# EAGLE board CT_schematic (EAGLE 7.6.0)

Size 100 x 80 mm. Coordinates in mm from the lower left corner, seen from the top.
Outline: 0,0 100,0 100,80 0,80 0,0
Copper layers (1*16): Top 0.035mm / dielectric 1.5mm / Bottom 0.035mm
Design rules "default": minimum track width 10mil, minimum drill 24mil, track to track 8mil, track to pad 8mil, pad to pad 8mil, via to via 8mil, smd to smd 8mil, copper to edge 40mil, drill to drill 8mil, minimum pad ring 10mil, minimum via ring 8mil, stop-mask expansion 4mil, vias tented up to drill 0mil, thermal gap 10mil

## Footprints (pad centres in the part's own frame; a part is rotated, then mirrored left to right if it is on the bottom)
C0603 = smd 0.8 x 0.8: 1 -0.762,0; 2 0.762,0
C0402 = smd 0.5 x 0.5: 1 -0.508,0; 2 0.508,0
C0805 = smd 1.2 x 1.3: 1 -1.016,0; 2 1.016,0
C1210 = smd 1.2 x 2.5: 1 -1.524,0; 2 1.524,0
R0603 = smd 0.8 x 0.8: 1 -0.762,0; 2 0.762,0
EXV-9H = smd 3.505 x 1.676: 1 -2.857,0; 2 2.857,0
L1210 = smd 1.2 x 2.5: 1 -1.524,0; 2 1.524,0
PJ-037B_PACKAGE = drill 3.7 square: 1 12,0 | drill 3.2 square: 2 6,0
UFBGA132 = smd 0.32 x 0.32: A1 -2.75,2.75; A2 -2.25,2.75; A3 -1.75,2.75; A4 -1.25,2.75; A5 -0.75,2.75; A6 -0.25,2.75; A7 0.25,2.75; A8 0.75,2.75; A9 1.25,2.75; A10 1.75,2.75; A11 2.25,2.75; A12 2.75,2.75; B1 -2.75,2.25; B2 -2.25,2.25; B3 -1.75,2.25; B4 -1.25,2.25; B5 -0.75,2.25; B6 -0.25,2.25; B7 0.25,2.25; B8 0.75,2.25; B9 1.25,2.25; B10 1.75,2.25; B11 2.25,2.25; B12 2.75,2.25; C1 -2.75,1.75; C2 -2.25,1.75; C3 -1.75,1.75; C4 -1.25,1.75; C5 -0.75,1.75; C6 -0.25,1.75; C7 0.25,1.75; C8 0.75,1.75; C9 1.25,1.75; C10 1.75,1.75; C11 2.25,1.75; C12 2.75,1.75; D1 -2.75,1.25; D2 -2.25,1.25; D3 -1.75,1.25; D4 -1.25,1.25; D5 -0.75,1.25; D6 -0.25,1.25; D7 0.25,1.25; D8 0.75,1.25; D9 1.25,1.25; D10 1.75,1.25; D11 2.25,1.25; D12 2.75,1.25; E1 -2.75,0.75; E2 -2.25,0.75; E3 -1.75,0.75; E4 -1.25,0.75; E9 1.25,0.75; E10 1.75,0.75; E11 2.25,0.75; E12 2.75,0.75; F1 -2.75,0.25; F2 -2.25,0.25; F3 -1.75,0.25; F4 -1.25,0.25; F6 -0.25,0.25; F7 0.25,0.25; F9 1.25,0.25; F10 1.75,0.25; F11 2.25,0.25; F12 2.75,0.25; G1 -2.75,-0.25; G2 -2.25,-0.25; G3 -1.75,-0.25; G4 -1.25,-0.25; G6 -0.25,-0.25; G7 0.25,-0.25; G9 1.25,-0.25; G10 1.75,-0.25; G11 2.25,-0.25; G12 2.75,-0.25; H1 -2.75,-0.75; H2 -2.25,-0.75; H3 -1.75,-0.75; H4 -1.25,-0.75; H9 1.25,-0.75; H10 1.75,-0.75; H11 2.25,-0.75; H12 2.75,-0.75; J1 -2.75,-1.25; J2 -2.25,-1.25; J3 -1.75,-1.25; J4 -1.25,-1.25; J5 -0.75,-1.25; J6 -0.25,-1.25; J7 0.25,-1.25; J8 0.75,-1.25; J9 1.25,-1.25; J10 1.75,-1.25; J11 2.25,-1.25; J12 2.75,-1.25; K1 -2.75,-1.75; K2 -2.25,-1.75; K3 -1.75,-1.75; K4 -1.25,-1.75; K5 -0.75,-1.75; K6 -0.25,-1.75; K7 0.25,-1.75; K8 0.75,-1.75; K9 1.25,-1.75; K10 1.75,-1.75; K11 2.25,-1.75; K12 2.75,-1.75; L1 -2.75,-2.25; L2 -2.25,-2.25; L3 -1.75,-2.25; L4 -1.25,-2.25; L5 -0.75,-2.25; L6 -0.25,-2.25; L7 0.25,-2.25; L8 0.75,-2.25; L9 1.25,-2.25; L10 1.75,-2.25; L11 2.25,-2.25; L12 2.75,-2.25; M1 -2.75,-2.75; M2 -2.25,-2.75; M3 -1.75,-2.75; M4 -1.25,-2.75; M5 -0.75,-2.75; M6 -0.25,-2.75; M7 0.25,-2.75; M8 0.75,-2.75; M9 1.25,-2.75; M10 1.75,-2.75; M11 2.25,-2.75; M12 2.75,-2.75
WSON-6 = smd 0.4 x 0.6: 1 -1,-1.4; 2 0,-1.4; 3 1,-1.4; 4 1,1.4; 5 0,1.4; 6 -1,1.4 | drill 0.2 pad 0.3: P$1 0.95,0; P$2 -0.95,0; P$3 0,-0.5; P$4 0,0.5 | smd 2.4 x 1.5: PAD 0,0
TST-110-05-T-D-RA = drill 1 pad 1.7 square: 1 0,0 | drill 1 pad 1.7: 2 0,2.54; 3 2.54,0; 4 2.54,2.54; 5 5.08,0; 6 5.08,2.54; 7 7.62,0; 8 7.62,2.54; 9 10.16,0; 10 10.16,2.54; 11 12.7,0; 12 12.7,2.54; 13 15.24,0; 14 15.24,2.54; 15 17.78,0; 16 17.78,2.54; 17 20.32,0; 18 20.32,2.54; 19 22.86,0; 20 22.86,2.54
SSOP-16 = smd 1.981 x 0.356: 1 -2.464,2.223; 2 -2.464,1.587; 3 -2.464,0.953; 4 -2.464,0.318; 5 -2.464,-0.318; 6 -2.464,-0.953; 7 -2.464,-1.587; 8 -2.464,-2.223; 9 2.464,-2.223; 10 2.464,-1.587; 11 2.464,-0.953; 12 2.464,-0.318; 13 2.464,0.318; 14 2.464,0.953; 15 2.464,1.587; 16 2.464,2.223
182-009-MALE = drill 1.194 pad 1.524 octagon: 1 -5.537,10.923; 2 -2.769,10.923; 3 0,10.923; 4 2.769,10.923; 5 5.537,10.923; 6 -4.153,8.08; 7 -1.384,8.08; 8 1.384,8.08; 9 4.153,8.08 | hole 3.048: -12.446,9.501; 12.446,9.501
SOIC-8 = smd 1.6 x 0.6: 1 -2.7,1.905 | smd 1.55 x 0.6: 2 -2.7,0.635; 3 -2.7,-0.635; 4 -2.7,-1.905; 5 2.7,-1.905; 6 2.7,-0.635; 7 2.7,0.635; 8 2.7,1.905
MOLEX_47219-2001 = smd 0.8 x 1.5: 1 3.2,-2.1; 2 2.1,-2.1; 3 1,-2.1; 4 -0.1,-2.1; 5 -1.2,-2.1; 6 -2.3,-2.1; 7 -3.4,-2.1; 8 -4.5,-2.1 | smd 1.5 x 2.05: G1 6.875,-4.7; G2 6.875,3.6; G3 -6.875,3.6; G4 -6.875,-4.7
LBGA-64 = smd 0.559 x 0.559: A1 -3.5,3.5; A2 -2.5,3.5; A3 -1.5,3.5; A4 -0.5,3.5; A5 0.5,3.5; A6 1.5,3.5; A7 2.5,3.5; A8 3.5,3.5; B1 -3.5,2.5; B2 -2.5,2.5; B3 -1.5,2.5; B4 -0.5,2.5; B5 0.5,2.5; B6 1.5,2.5; B7 2.5,2.5; B8 3.5,2.5; C1 -3.5,1.5; C2 -2.5,1.5; C3 -1.5,1.5; C4 -0.5,1.5; C5 0.5,1.5; C6 1.5,1.5; C7 2.5,1.5; C8 3.5,1.5; D1 -3.5,0.5; D2 -2.5,0.5; D3 -1.5,0.5; D4 -0.5,0.5; D5 0.5,0.5; D6 1.5,0.5; D7 2.5,0.5; D8 3.5,0.5; E1 -3.5,-0.5; E2 -2.5,-0.5; E3 -1.5,-0.5; E4 -0.5,-0.5; E5 0.5,-0.5; E6 1.5,-0.5; E7 2.5,-0.5; E8 3.5,-0.5; F1 -3.5,-1.5; F2 -2.5,-1.5; F3 -1.5,-1.5; F4 -0.5,-1.5; F5 0.5,-1.5; F6 1.5,-1.5; F7 2.5,-1.5; F8 3.5,-1.5; G1 -3.5,-2.5; G2 -2.5,-2.5; G3 -1.5,-2.5; G4 -0.5,-2.5; G5 0.5,-2.5; G6 1.5,-2.5; G7 2.5,-2.5; G8 3.5,-2.5; H1 -3.5,-3.5; H2 -2.5,-3.5; H3 -1.5,-3.5; H4 -0.5,-3.5; H5 0.5,-3.5; H6 1.5,-3.5; H7 2.5,-3.5; H8 3.5,-3.5
ABS07-32.768KHZ-7-T = smd 1.1 x 2.4: 1 -2.5,0; 2 0,0
ABLS-25.000MHZ-B2F-T = smd 5.6 x 2.8: 1 -3.81,0; 2 5.69,0
WSON-8 = smd 0.3 x 0.6: 1 -0.75,0; 2 0.05,0; 3 0.85,0; 4 1.65,0; 5 1.65,3.8; 6 0.85,3.8; 7 0.05,3.8; 8 -0.75,3.8 | smd 3 x 2.6: PAD 0.45,1.9
SON-6 = smd 0.55 x 0.3: 1 -0.355,0.5 | smd 0.52 x 0.3: 2 -0.37,0; 3 -0.37,-0.5; 4 0.37,-0.5; 5 0.37,0; 6 0.37,0.5
SW_4-1437565-2 = smd 1.4 x 2.1: 1 -2.23,4.55; 2 -2.23,-4.55; 3 2.23,4.55; 4 2.23,-4.55
LGM67K-G1J2-24-Z = smd 0.8 x 1.4: A -2,0; C 0,0
NC7SZ125M5X = smd 1.3 x 0.7: 1 -1.3,0.95; 2 -1.3,0; 3 -1.3,-0.95; 4 1.3,-0.95; 5 1.3,0.95

## Placement (x,y rotation side)
C1  1e-06  [C0603]  -41.91,81.28 0 top  (outside the outline)
C2  1e-07  [C0603]  -45.72,81.28 0 top  (outside the outline)
C3  1e-07  [C0603]  -49.53,81.28 0 top  (outside the outline)
C4  1e-07  [C0603]  -53.34,81.28 0 top  (outside the outline)
C5  1e-07  [C0603]  -57.15,81.28 0 top  (outside the outline)
C6  1e-07  [C0603]  -60.96,81.28 0 top  (outside the outline)
C7  1e-07  [C0603]  -64.77,81.28 0 top  (outside the outline)
C8  1e-07  [C0603]  -68.58,81.28 0 top  (outside the outline)
C9  1e-07  [C0603]  -72.39,81.28 0 top  (outside the outline)
C10  4.7e-06  [C0603]  -34.29,81.28 0 top  (outside the outline)
C11  1e-07  [C0603]  -76.2,81.28 0 top  (outside the outline)
C12  1e-07  [C0603]  -80.01,81.28 0 top  (outside the outline)
C13  1e-07  [C0603]  -83.82,81.28 0 top  (outside the outline)
C14  1e-08  [C0603]  -87.63,81.28 0 top  (outside the outline)
C15  1e-06  [C0603]  -15.24,86.36 0 top  (outside the outline)
C16  1e-11  [C0402]  -80.01,86.36 0 top  (outside the outline)
C17  1e-11  [C0402]  -83.82,86.36 0 top  (outside the outline)
C18  1e-11  [C0402]  -87.63,86.36 0 top  (outside the outline)
C19  1e-11  [C0402]  -15.24,91.44 0 top  (outside the outline)
C20  1e-08  [C0402]  -19.05,91.44 0 top  (outside the outline)
C21  1e-07  [C0402]  -22.86,91.44 0 top  (outside the outline)
C22  1e-07  [C0402]  -26.67,91.44 0 top  (outside the outline)
C23  1e-06  [C0603]  -19.05,86.36 0 top  (outside the outline)
C24  1e-06  [C0603]  -22.86,86.36 0 top  (outside the outline)
C25  2.2e-07  [C0603]  -38.1,81.28 0 top  (outside the outline)
C26  1e-06  [C0603]  -26.67,86.36 0 top  (outside the outline)
C27  1e-06  [C0603]  -30.48,86.36 0 top  (outside the outline)
C28  1e-06  [C0603]  -34.29,86.36 0 top  (outside the outline)
C29  1e-06  [C0603]  -38.1,86.36 0 top  (outside the outline)
C30  1e-07  [C0402]  -30.48,91.44 0 top  (outside the outline)
C31  1e-05  [C0805]  -46.99,69.85 0 top  (outside the outline)
C32  1e-08  [C0402]  -34.29,91.44 0 top  (outside the outline)
C33  1e-08  [C0402]  -38.1,91.44 0 top  (outside the outline)
C34  1e-08  [C0402]  -41.91,91.44 0 top  (outside the outline)
C35  1e-05  [C1210]  -80.01,63.5 0 top  (outside the outline)
C36  1e-05  [C1210]  -86.36,63.5 0 top  (outside the outline)
C37  8e-07  [R0603]  -41.91,86.36 0 top  (outside the outline)
C38  1e-05  [C1210]  -16.51,71.12 0 top  (outside the outline)
C39  1e-07  [C0402]  -45.72,91.44 0 top  (outside the outline)
C40  0.0001  [EXV-9H]  -80.01,54.61 0 top  (outside the outline)
C41  0.0001  [EXV-9H]  -17.78,63.5 0 top  (outside the outline)
C42  1e-08  [C0402]  -49.53,91.44 0 top  (outside the outline)
C43  1e-08  [C0402]  -53.34,91.44 0 top  (outside the outline)
C44  1e-08  [C0402]  -57.15,91.44 0 top  (outside the outline)
I1  1e-05  [L1210]  -22.86,71.12 0 top  (outside the outline)
J1  PJ-037B  [PJ-037B_PACKAGE]  -62.23,29.21 0 top  (outside the outline)
R2  1000.0  [R0603]  -45.72,86.36 0 top  (outside the outline)
R4  4700.0  [R0603]  -49.53,86.36 0 top  (outside the outline)
R5  4700.0  [R0603]  -53.34,86.36 0 top  (outside the outline)
R6  2200.0  [R0603]  -57.15,86.36 0 top  (outside the outline)
R7  2200.0  [R0603]  -60.96,86.36 0 top  (outside the outline)
R8  10000.0  [R0603]  -40.64,76.2 0 top  (outside the outline)
R9  10000.0  [R0603]  -45.72,76.2 0 top  (outside the outline)
R10  10000.0  [R0603]  -50.8,76.2 0 top  (outside the outline)
R11  10000.0  [R0603]  -55.88,76.2 0 top  (outside the outline)
R12  10000.0  [R0603]  -60.96,76.2 0 top  (outside the outline)
R13  10000.0  [R0603]  -66.04,76.2 0 top  (outside the outline)
R14  10000.0  [R0603]  -71.12,76.2 0 top  (outside the outline)
R15  100000.0  [R0603]  -52.07,69.85 0 top  (outside the outline)
R16  120.0  [R0603]  -64.77,86.36 0 top  (outside the outline)
R17  100000.0  [R0603]  -57.15,69.85 0 top  (outside the outline)
R18  100000.0  [R0603]  -62.23,69.85 0 top  (outside the outline)
R19  100000.0  [R0603]  -67.31,69.85 0 top  (outside the outline)
R20  100000.0  [R0603]  -72.39,69.85 0 top  (outside the outline)
R21  100000.0  [R0603]  -77.47,69.85 0 top  (outside the outline)
R22  100000.0  [R0603]  -82.55,69.85 0 top  (outside the outline)
R23  10000.0  [R0603]  -76.2,76.2 0 top  (outside the outline)
R24  10000.0  [R0603]  -81.28,76.2 0 top  (outside the outline)
R25  10000.0  [R0603]  -86.36,76.2 0 top  (outside the outline)
R26  10000.0  [R0603]  -15.24,81.28 0 top  (outside the outline)
R27  10000.0  [R0603]  -20.32,81.28 0 top  (outside the outline)
R28  100000.0  [R0603]  -87.63,69.85 0 top  (outside the outline)
R29  2231.0  [R0603]  -68.58,86.36 0 top  (outside the outline)
R30  1000.0  [R0603]  -72.39,86.36 0 top  (outside the outline)
R31  100000.0  [R0603]  -15.24,76.2 0 top  (outside the outline)
R32  300000.0  [R0603]  -20.32,76.2 0 top  (outside the outline)
R33  100000.0  [R0603]  -25.4,76.2 0 top  (outside the outline)
R34  10000.0  [R0603]  -25.4,81.28 0 top  (outside the outline)
R35  10000.0  [R0603]  -30.48,81.28 0 top  (outside the outline)
R36  9100.0  [R0603]  -76.2,86.36 0 top  (outside the outline)
R37  680000.0  [R0603]  -30.48,76.2 0 top  (outside the outline)
R38  120000.0  [R0603]  -35.56,76.2 0 top  (outside the outline)
U1  STM32L486QGI6  [UFBGA132]  -24.13,44.45 0 top  (outside the outline)
U2  HDC1080DMBR  [WSON-6]  -71.12,54.61 0 top  (outside the outline)
U3  TST-110-05-T-D-RA  [TST-110-05-T-D-RA]  -66.04,52.07 0 top  (outside the outline)
U4  LTC2804CGN-1#PBF  [SSOP-16]  -44.45,43.18 0 top  (outside the outline)
U5  182-009-113R531  [182-009-MALE]  -36.83,6.35 0 top  (outside the outline)
U6  MCP2562-E/SN  [SOIC-8]  -57.15,43.18 0 top  (outside the outline)
U7  182-009-113R531  [182-009-MALE]  -76.2,6.35 0 top  (outside the outline)
U8  0472192001  [MOLEX_47219-2001]  -22.86,30.48 0 top  (outside the outline)
U9  mt28ew512aba1HPC-0AAT  [LBGA-64]  -39.37,29.21 0 top  (outside the outline)
U10  ABS07-32.768KHZ-7-T  [ABS07-32.768KHZ-7-T]  -59.69,63.5 0 top  (outside the outline)
U11  ABLS-25.000MHZ-B2F-T  [ABLS-25.000MHZ-B2F-T]  -36.83,63.5 0 top  (outside the outline)
U12  LP3878SDX-ADJ/NOPB  [WSON-8]  -78.74,41.91 0 top  (outside the outline)
U13  LP2951ACSDX/NOPB  [WSON-8]  -29.21,53.34 0 top  (outside the outline)
U14  TPS3895ADRYR  [SON-6]  -59.69,90.17 0 top  (outside the outline)
U15  4-1437565-2  [SW_4-1437565-2]  -78.74,27.94 0 top  (outside the outline)
U16  Q65110A2395  [LGM67K-G1J2-24-Z]  -68.58,63.5 0 top  (outside the outline)
U17  nc7sz125m5x  [NC7SZ125M5X]  -27.94,69.85 0 top  (outside the outline)
U18  nc7sz125m5x  [NC7SZ125M5X]  -34.29,69.85 0 top  (outside the outline)
U19  nc7sz125m5x  [NC7SZ125M5X]  -40.64,69.85 0 top  (outside the outline)

## Library data of the parts
C1-C44 I1 J1 R2 R4-R38 U1-U19 = circuit_tree

## Nets
CLK_CRYSTAL_U1_D1: C16.1 U1.D1 U10.1
CLK_CRYSTAL_U1_E1: C17.1 U1.E1 U10.2
CLK_CRYSTAL_U1_F1: C18.1 U1.F1 U11.1
CLK_CRYSTAL_U1_G1: C19.1 U1.G1 U11.2
GND: C1.2 C2.2 C3.2 C4.2 C5.2 C6.2 C7.2 C8.2 C9.2 C10.2 C11.2 C12.2 C13.2 C14.2 C15.2 C16.2 C17.2 C18.2 C19.2 C20.2 C21.2 C22.2 C23.2 C24.2 C26.2 C27.2 C28.2 C29.2 C30.2 C31.2 C32.2 C33.2 C34.2 C35.2 C36.2 C37.2 C38.2 C39.2 C40.2 C41.2 C42.2 C43.2 C44.2 J1.2 R2.2 R8.2 R14.2 R30.2 R33.2 R36.2 R38.2 U1.D3 U1.E3 U1.F2 U1.F6 U1.F7 U1.F11 U1.F12 U1.J1 U2.2 U2.PAD U3.4 U3.6 U3.8 U3.10 U3.12 U3.14 U3.16 U3.18 U3.20 U4.8 U5.5 U6.2 U6.8 U7.5 U8.6 U8.G1 U8.G2 U8.G3 U8.G4 U9.E8 U9.H2 U9.H7 U12.3 U12.PAD U13.3 U13.4 U13.PAD U14.2 U16.C U17.2 U17.3 U18.1 U18.3 U19.1 U19.3
NET_U1_A4: R8.1 U1.A4
NET_U1_B3: R7.1 U1.B3 U2.1
NET_U1_B5: R6.1 U1.B5 U2.6
NET_U1_H2: R5.1 U1.H2 U19.4
NET_U1_M5: U16.A
NET_U1_M6: U15.3 U15.4
NET_U3_19: R14.1 U3.19
NET_U4_6: C23.1 U4.6
NET_U4_7: C25.1 I1.2 U4.7
NET_U4_9: C24.1 U4.9
NET_U4_10: C25.2 U4.10
NET_U4_11: R15.1 U4.11
NET_U5_2: U4.1 U5.2
NET_U5_3: U4.3 U5.3
NET_U5_7: U4.2 U5.7
NET_U5_8: U4.4 U5.8
NET_U6_6: R16.2 U6.6
NET_U7_2: R16.2 U6.6 U7.2
NET_U7_3: R16.1 U6.7 U7.3
NET_U9_B4: R26.1 U9.B4
NET_U9_B5: R4.1 U9.B5 U18.4
NET_U12_1: C34.1 U12.1
NET_U12_6: R29.2 R30.1 U12.6
NET_U12_8: R28.1 U12.8
NET_U13_5: R31.1 U13.5
NET_U13_7: R32.2 R33.1 U13.7
NET_U14_1: R35.1 R36.1 U14.1
NET_U14_3: R37.2 R38.1 U14.3
NET_U14_4: R34.1 U14.4 U17.4 U18.2 U19.2
NET_U15_1: R2.1 U15.1 U15.2
PROC_CAN1_RX: U1.A3 U6.4
PROC_CAN1_TX: U1.A12 U6.1
PROC_FMC_A0: U1.D6 U9.E2
PROC_FMC_A1: U1.D5 U9.D2
PROC_FMC_A2: U1.D4 U9.C2
PROC_FMC_A3: U1.E4 U9.A2
PROC_FMC_A4: U1.F3 U9.B2
PROC_FMC_A5: U1.F4 U9.D3
PROC_FMC_A6: U1.J7 U9.C3
PROC_FMC_A7: U1.K7 U9.A3
PROC_FMC_A8: U1.J8 U9.B6
PROC_FMC_A9: U1.J9 U9.A6
PROC_FMC_A10: U1.H9 U9.C6
PROC_FMC_A11: U1.G9 U9.D6
PROC_FMC_A12: U1.G10 U9.B7
PROC_FMC_A13: U1.F9 U9.A7
PROC_FMC_A14: U1.F10 U9.C7
PROC_FMC_A15: U1.E9 U9.D7
PROC_FMC_A16: U1.J11 U9.E7
PROC_FMC_A17: U1.J10 U9.B3
PROC_FMC_A18: U1.H12 U9.C4
PROC_FMC_A19: U1.A1 U9.D5
PROC_FMC_A20: U1.B1 U9.D4
PROC_FMC_A21: U1.C2 U9.C5
PROC_FMC_A22: U1.D2 U9.B8
PROC_FMC_A23: U1.B2 U9.C8
PROC_FMC_A24: U1.C7 U9.F8
PROC_FMC_D0: U1.H11 U9.E3
PROC_FMC_D1: U1.H10 U9.H3
PROC_FMC_D2: U1.C9 U9.E4
PROC_FMC_D3: U1.B9 U9.H4
PROC_FMC_D4: U1.M7 U9.H5
PROC_FMC_D5: U1.L7 U9.E5
PROC_FMC_D6: U1.M8 U9.H6
PROC_FMC_D7: U1.L8 U9.E6
PROC_FMC_D8: U1.M9 U9.F3
PROC_FMC_D9: U1.L9 U9.G3
PROC_FMC_D10: U1.M10 U9.F4
PROC_FMC_D11: U1.M11 U9.G4
PROC_FMC_D12: U1.M12 U9.F5
PROC_FMC_D13: U1.K9 U9.G6
PROC_FMC_D14: U1.K8 U9.F6
PROC_FMC_D15: U1.J12 U9.G7
PROC_FMC_NBL0: R27.1 U1.C3 U9.F7
PROC_FMC_NE3: R23.1 U1.D8 U9.F2
PROC_FMC_NOE: R24.1 U1.B7 U9.G2
PROC_FMC_NWAIT: U1.B6 U9.A4
PROC_FMC_NWE: R25.1 U1.A6 U9.A5
PROC_LPUART1_CTS: U1.K12 U4.13
PROC_LPUART1_RTS: U1.G4 U4.15
PROC_LPUART1_RX: U1.H1 U4.16
PROC_LPUART1_TX: U1.H4 U4.14
PROC_SDMMC1_CK: R18.1 U1.B10 U8.5
PROC_SDMMC1_CMD: R17.1 U1.C8 U8.3
PROC_SDMMC1_D0: R19.1 U1.E10 U8.7
PROC_SDMMC1_D1: R20.1 U1.D12 U8.8
PROC_SDMMC1_D2: R21.1 U1.B11 U8.1
PROC_SDMMC1_D3: R22.1 U1.C10 U8.2
PROC_SYS_JTCK_SWCLK: R12.1 U1.A10 U3.9
PROC_SYS_JTDI: R10.1 U1.A9 U3.5
PROC_SYS_JTDO_SWO: U1.A8 U3.13
PROC_SYS_JTMS_SWDIO: R11.1 U1.A11 U3.7
PROC_SYS_JTRST: R9.1 U1.A7 U3.3
RST_OUT_U3_SRESET_B: R13.1 U3.15 U17.1
VCC_S1_13V8: C35.1 C37.1 C40.1 C41.1 J1.1 R28.2 U12.4 U13.8
VCC_TIER1_3V3: C1.1 C2.1 C3.1 C4.1 C5.1 C6.1 C7.1 C8.1 C9.1 C10.1 C11.1 C12.1 C13.1 C14.1 C15.1 C20.1 C21.1 C22.1 C26.1 C27.1 C29.1 C30.1 C31.1 C32.1 C33.1 C36.1 C39.1 C42.1 C43.1 C44.1 I1.1 R4.2 R5.2 R6.2 R7.2 R9.2 R10.2 R11.2 R12.2 R13.2 R15.2 R17.2 R18.2 R19.2 R20.2 R21.2 R22.2 R23.2 R24.2 R25.2 R26.2 R27.2 R29.1 R34.2 R35.2 R37.1 U1.C4 U1.C11 U1.E2 U1.G2 U1.G6 U1.G7 U1.G11 U1.G12 U1.H3 U1.L1 U1.M1 U2.5 U3.1 U3.2 U4.5 U4.12 U6.5 U8.4 U9.D8 U9.F1 U9.G5 U12.5 U14.6 U17.5 U18.5 U19.5
VCC_TIER1_5V0: C28.1 C38.1 R31.2 R32.1 U6.3 U13.1

## Tracks (layer width: path | path; a pad name or v marks a point on that pad's centre or on a via)
CLK_CRYSTAL_U1_D1  (2 unrouted)
CLK_CRYSTAL_U1_E1  (2 unrouted)
CLK_CRYSTAL_U1_F1  (2 unrouted)
CLK_CRYSTAL_U1_G1  (2 unrouted)
GND  (95 unrouted)
NET_U1_A4  (1 unrouted)
NET_U1_B3  (2 unrouted)
NET_U1_B5  (2 unrouted)
NET_U1_H2  (2 unrouted)
NET_U1_M6  (1 unrouted)
NET_U3_19  (1 unrouted)
NET_U4_6  (1 unrouted)
NET_U4_7  (2 unrouted)
NET_U4_9  (1 unrouted)
NET_U4_10  (1 unrouted)
NET_U4_11  (1 unrouted)
NET_U5_2  (1 unrouted)
NET_U5_3  (1 unrouted)
NET_U5_7  (1 unrouted)
NET_U5_8  (1 unrouted)
NET_U6_6  (1 unrouted)
NET_U7_2  (2 unrouted)
NET_U7_3  (2 unrouted)
NET_U9_B4  (1 unrouted)
NET_U9_B5  (2 unrouted)
NET_U12_1  (1 unrouted)
NET_U12_6  (2 unrouted)
NET_U12_8  (1 unrouted)
NET_U13_5  (1 unrouted)
NET_U13_7  (2 unrouted)
NET_U14_1  (2 unrouted)
NET_U14_3  (2 unrouted)
NET_U14_4  (4 unrouted)
NET_U15_1  (2 unrouted)
PROC_CAN1_RX  (1 unrouted)
PROC_CAN1_TX  (1 unrouted)
PROC_FMC_A0  (1 unrouted)
PROC_FMC_A1  (1 unrouted)
PROC_FMC_A2  (1 unrouted)
PROC_FMC_A3  (1 unrouted)
PROC_FMC_A4  (1 unrouted)
PROC_FMC_A5  (1 unrouted)
PROC_FMC_A6  (1 unrouted)
PROC_FMC_A7  (1 unrouted)
PROC_FMC_A8  (1 unrouted)
PROC_FMC_A9  (1 unrouted)
PROC_FMC_A10  (1 unrouted)
PROC_FMC_A11  (1 unrouted)
PROC_FMC_A12  (1 unrouted)
PROC_FMC_A13  (1 unrouted)
PROC_FMC_A14  (1 unrouted)
PROC_FMC_A15  (1 unrouted)
PROC_FMC_A16  (1 unrouted)
PROC_FMC_A17  (1 unrouted)
PROC_FMC_A18  (1 unrouted)
PROC_FMC_A19  (1 unrouted)
PROC_FMC_A20  (1 unrouted)
PROC_FMC_A21  (1 unrouted)
PROC_FMC_A22  (1 unrouted)
PROC_FMC_A23  (1 unrouted)
PROC_FMC_A24  (1 unrouted)
PROC_FMC_D0  (1 unrouted)
PROC_FMC_D1  (1 unrouted)
PROC_FMC_D2  (1 unrouted)
PROC_FMC_D3  (1 unrouted)
PROC_FMC_D4  (1 unrouted)
PROC_FMC_D5  (1 unrouted)
PROC_FMC_D6  (1 unrouted)
PROC_FMC_D7  (1 unrouted)
PROC_FMC_D8  (1 unrouted)
PROC_FMC_D9  (1 unrouted)
PROC_FMC_D10  (1 unrouted)
PROC_FMC_D11  (1 unrouted)
PROC_FMC_D12  (1 unrouted)
PROC_FMC_D13  (1 unrouted)
PROC_FMC_D14  (1 unrouted)
PROC_FMC_D15  (1 unrouted)
PROC_FMC_NBL0  (2 unrouted)
PROC_FMC_NE3  (2 unrouted)
PROC_FMC_NOE  (2 unrouted)
PROC_FMC_NWAIT  (1 unrouted)
PROC_FMC_NWE  (2 unrouted)
PROC_LPUART1_CTS  (1 unrouted)
PROC_LPUART1_RTS  (1 unrouted)
PROC_LPUART1_RX  (1 unrouted)
PROC_LPUART1_TX  (1 unrouted)
PROC_SDMMC1_CK  (2 unrouted)
PROC_SDMMC1_CMD  (2 unrouted)
PROC_SDMMC1_D0  (2 unrouted)
PROC_SDMMC1_D1  (2 unrouted)
PROC_SDMMC1_D2  (2 unrouted)
PROC_SDMMC1_D3  (2 unrouted)
PROC_SYS_JTCK_SWCLK  (2 unrouted)
PROC_SYS_JTDI  (2 unrouted)
PROC_SYS_JTDO_SWO  (1 unrouted)
PROC_SYS_JTMS_SWDIO  (2 unrouted)
PROC_SYS_JTRST  (2 unrouted)
RST_OUT_U3_SRESET_B  (2 unrouted)
VCC_S1_13V8  (7 unrouted)
VCC_TIER1_3V3  (81 unrouted)
VCC_TIER1_5V0  (5 unrouted)